# Altium PCB 1_ir-tara-f.PcbDoc (part 2 of 8)
Units mm, origin at the board's own origin, x right, y up, seen from the top; angles counter-clockwise.
Board outline 151 x 86.38 mm, 2 copper layers (Top Layer, Bottom Layer); 728 components, 20 nets, 2100 pads, 0 vias.
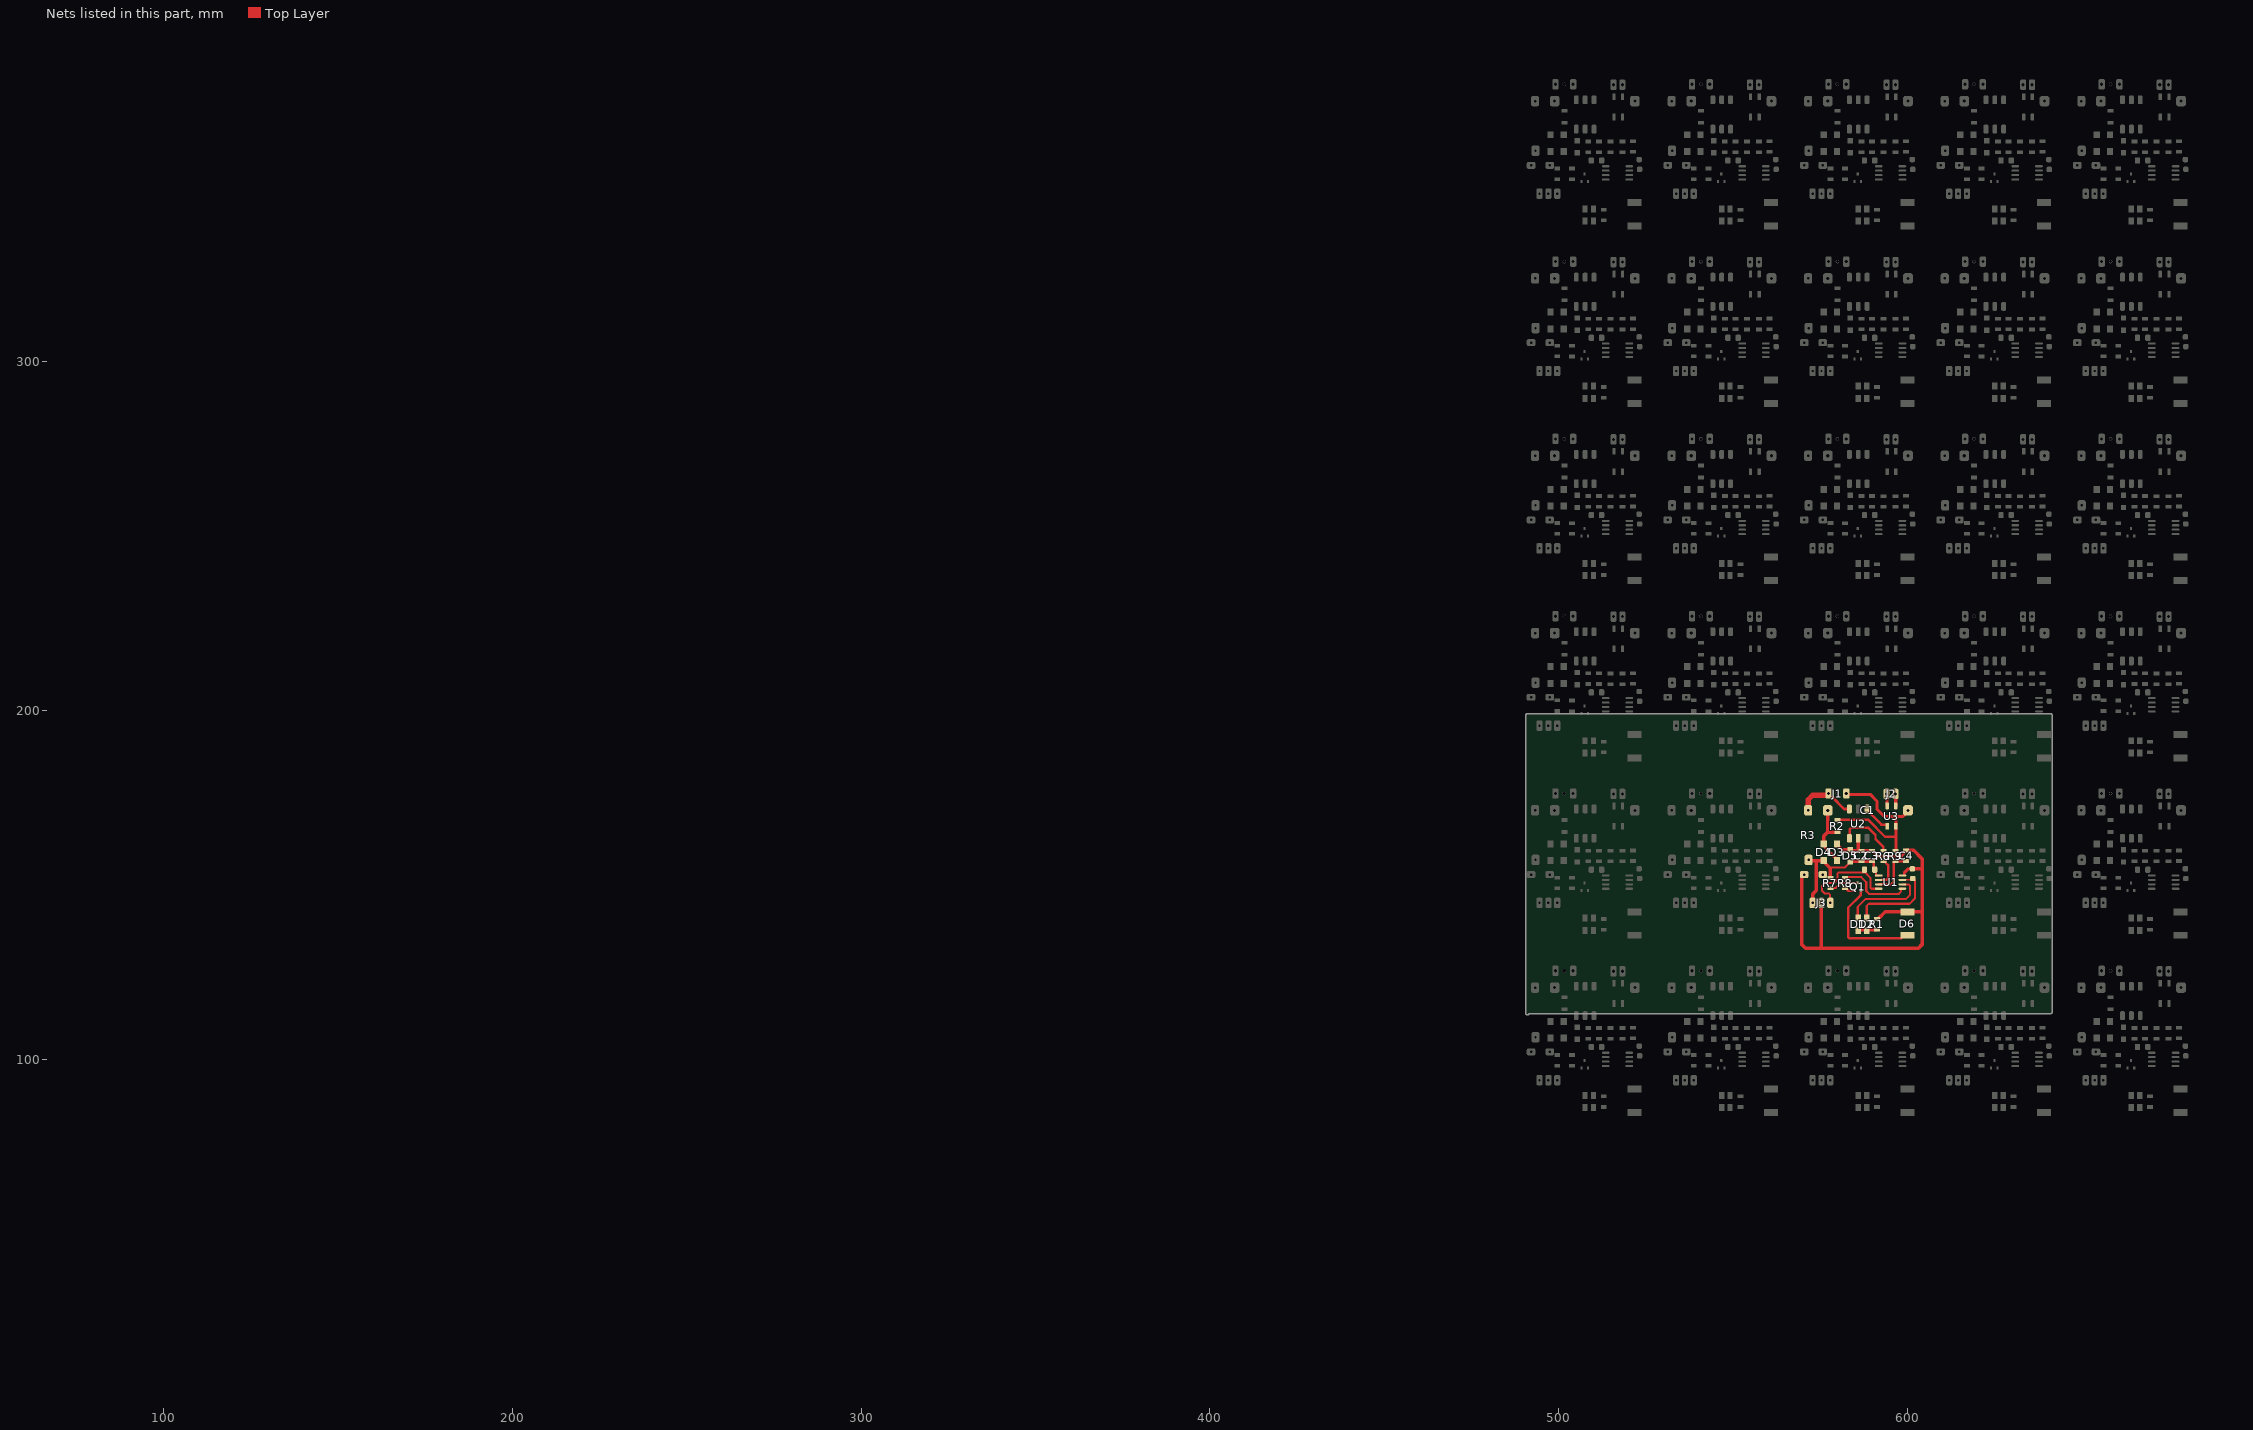
[diagram p2: the nets of this part, all layers, seen from the top]

## Part data
C1 C1 C1 C1 C1 C1 C1 C1 C1 C1 C1 C1 C1 C1 C1 C1 C1 C1 C1 C1 C1 C1 C1 C1 C1 C1 C1 C1 C1 C1: "Capacitor 24*9mm"
C2 C2 C2 C2 C2 C2 C2 C2 C2 C2 C2 C2 C2 C2 C2 C2 C2 C2 C2 C2 C2 C2 C2 C2 C2 C2 C2 C2 C2 C2 C3 C3 C3 C3 C3 C3 C3 C3 C3 C3 C3 C3 C3 C3 C3 C3 C3 C3 C3 C3 C3 C3 C3 C3 C3 C3 C3 C3 C3 C3 C4 C4 C4 C4 C4 C4 C4 C4 C4 C4 C4 C4 C4 C4 C4 C4 C4 C4 C4 C4 C4 C4 C4 C4 C4 C4 C4 C4 C4 C4: library part Capacitor, "Capacitor"
D1 D1 D1 D1 D1 D1 D1 D1 D1 D1 D1 D1 D1 D1 D1 D1 D1 D1 D1 D1 D1 D1 D1 D1 D1 D1 D1 D1 D1 D1 D2 D2 D2 D2 D2 D2 D2 D2 D2 D2 D2 D2 D2 D2 D2 D2 D2 D2 D2 D2 D2 D2 D2 D2 D2 D2 D2 D2 D2 D2 D6 D6 D6 D6 D6 D6 D6 D6 D6 D6 D6 D6 D6 D6 D6 D6 D6 D6 D6 D6 D6 D6 D6 D6 D6 D6 D6 D6 D6 D6: "Typical RED, GREEN, YELLOW, AMBER GaAs LED"
D3 D3 D3 D3 D3 D3 D3 D3 D3 D3 D3 D3 D3 D3 D3 D3 D3 D3 D3 D3 D3 D3 D3 D3 D3 D3 D3 D3 D3 D3 D4 D4 D4 D4 D4 D4 D4 D4 D4 D4 D4 D4 D4 D4 D4 D4 D4 D4 D4 D4 D4 D4 D4 D4 D4 D4 D4 D4 D4 D4 D5 D5 D5 D5 D5 D5 D5 D5 D5 D5 D5 D5 D5 D5 D5 D5 D5 D5 D5 D5 D5 D5 D5 D5 D5 D5 D5 D5 D5 D5: "Tunnel Diode - RLC Model"
Q1 Q1 Q1 Q1 Q1 Q1 Q1 Q1 Q1 Q1 Q1 Q1 Q1 Q1 Q1 Q1 Q1 Q1 Q1 Q1 Q1 Q1 Q1 Q1 Q1 Q1 Q1 Q1 Q1 Q1: "NPN Bipolar Transistor"
R1 R1 R1 R1 R1 R1 R1 R1 R1 R1 R1 R1 R1 R1 R1 R1 R1 R1 R1 R1 R1 R1 R1 R1 R1 R1 R1 R1 R1 R1 R2 R2 R2 R2 R2 R2 R2 R2 R2 R2 R2 R2 R2 R2 R2 R2 R2 R2 R2 R2 R2 R2 R2 R2 R2 R2 R2 R2 R2 R2 R3 R3 R3 R3 R3 R3 R3 R3 R3 R3 R3 R3 R3 R3 R3 R3 R3 R3 R3 R3 R3 R3 R3 R3 R3 R3 R3 R3 R3 R3 R6 R6 R6 R6 R6 R6 R6 R6 R6 R6 R6 R6 R6 R6 R6 R6 R6 R6 R6 R6 R6 R6 R6 R6 R6 R6 R6 R6 R6 R6 R7 R7 R7 R7 R7 R7 R7 R7 R7 R7 R7 R7 R7 R7 R7 R7 R7 R7 R7 R7 R7 R7 R7 R7 R7 R7 R7 R7 R7 R7 R8 R8 R8 R8 R8 R8 R8 R8 R8 R8 R8 R8 R8 R8 R8 R8 R8 R8 R8 R8 R8 R8 R8 R8 R8 R8 R8 R8 R8 R8 R9 R9 R9 R9 R9 R9 R9 R9 R9 R9 R9 R9 R9 R9 R9 R9 R9 R9 R9 R9 R9 R9 R9 R9 R9 R9 R9 R9 R9 R9: library part Resistor, "Resistor"
U1 U1 U1 U1 U1 U1 U1 U1 U1 U1 U1 U1 U1 U1 U1 U1 U1 U1 U1 U1 U1 U1 U1 U1 U1 U1 U1 U1 U1 U1: "8-Bit AVR Microcontroller with 1K Byte of Flash Memory"
U2 U2 U2 U2 U2 U2 U2 U2 U2 U2 U2 U2 U2 U2 U2 U2 U2 U2 U2 U2 U2 U2 U2 U2 U2 U2 U2 U2 U2 U2: "Optoisolator Triac Output 5300Vrms 1 Channel 6-DIP"
U3 U3 U3 U3 U3 U3 U3 U3 U3 U3 U3 U3 U3 U3 U3 U3 U3 U3 U3 U3 U3 U3 U3 U3 U3 U3 U3 U3 U3 U3: "Bridge Rectifier Single Phase Standard 600V Surface Mount 4-SOIC"

## Free pads (board coordinates)
  round 0 hole 0.95: 2(486.659,373.516) 2(499.976,77.452) 2(673.588,386.741) 2(686.927,90.586) 3(486.684,368.441) 3(505.051,77.477) 3(668.513,386.716) 3(686.902,95.661) 94(488.516,333.741) 94(488.516,282.902) 94(488.516,232.063) 94(488.516,181.225) 94(488.516,130.386) 94(528.055,79.166) 94(528.055,384.959) 94(567.209,79.166) 94(567.209,384.959) 94(606.364,79.166) 94(606.364,384.959) 94(645.519,79.166) 94(645.519,384.959) 94(685.053,333.741) 94(685.053,282.902) 94(685.053,232.063) 94(685.053,181.225) 94(685.053,130.386) 95(685.053,79.166) 96(685.053,384.959) 97(488.516,384.959) 98(488.516,79.166)
  rrect50% 2.5x2 hole 0.7: 4(497.428,356.366) 4(497.428,305.527) 4(497.428,254.689) 4(497.428,203.85) 4(497.428,153.011) 4(497.428,102.173) 4(536.582,356.366) 4(536.582,305.527) 4(536.582,254.689) 4(536.582,203.85) 4(536.582,153.011) 4(536.582,102.173) 4(575.737,356.366) 4(575.737,305.527) 4(575.737,254.689) 4(575.737,203.85) 4(575.737,153.011) 4(575.737,102.173) 4(614.892,356.366) 4(614.892,305.527) 4(614.892,254.689) 4(614.892,203.85) 4(614.892,153.011) 4(614.892,102.173) 4(654.046,356.366) 4(654.046,305.527) 4(654.046,254.689) 4(654.046,203.85) 4(654.046,153.011) 4(654.046,102.173) 5(492.094,356.366) 5(492.094,305.527) 5(492.094,254.689) 5(492.094,203.85) 5(492.094,153.011) 5(492.094,102.173) 5(531.248,356.366) 5(531.248,305.527) 5(531.248,254.689) 5(531.248,203.85) 5(531.248,153.011) 5(531.248,102.173) 5(570.403,356.366) 5(570.403,305.527) 5(570.403,254.689) 5(570.403,203.85) 5(570.403,153.011) 5(570.403,102.173) 5(609.558,356.366) 5(609.558,305.527) 5(609.558,254.689) 5(609.558,203.85) 5(609.558,153.011) 5(609.558,102.173) 5(648.712,356.366) 5(648.712,305.527) 5(648.712,254.689) 5(648.712,203.85) 5(648.712,153.011) 5(648.712,102.173)
  rrect50% 1.524x1.524 all layers, no hole: 6(523.082,358.017) 6(523.082,307.178) 6(523.082,256.34) 6(523.082,205.501) 6(523.082,154.662) 6(523.082,103.824) 6(562.236,358.017) 6(562.236,307.178) 6(562.236,256.34) 6(562.236,205.501) 6(562.236,154.662) 6(562.236,103.824) 6(601.391,358.017) 6(601.391,307.178) 6(601.391,256.34) 6(601.391,205.501) 6(601.391,154.662) 6(601.391,103.824) 6(640.546,358.017) 6(640.546,307.178) 6(640.546,256.34) 6(640.546,205.501) 6(640.546,154.662) 6(640.546,103.824) 6(679.7,358.017) 6(679.7,307.178) 6(679.7,256.34) 6(679.7,205.501) 6(679.7,154.662) 6(679.7,103.824) 7(523.209,355.223) 7(523.209,304.384) 7(523.209,253.546) 7(523.209,202.707) 7(523.209,151.868) 7(523.209,101.03) 7(562.363,355.223) 7(562.363,304.384) 7(562.363,253.546) 7(562.363,202.707) 7(562.363,151.868) 7(562.363,101.03) 7(601.518,355.223) 7(601.518,304.384) 7(601.518,253.546) 7(601.518,202.707) 7(601.518,151.868) 7(601.518,101.03) 7(640.673,355.223) 7(640.673,304.384) 7(640.673,253.546) 7(640.673,202.707) 7(640.673,151.868) 7(640.673,101.03) 7(679.827,355.223) 7(679.827,304.384) 7(679.827,253.546) 7(679.827,202.707) 7(679.827,151.868) 7(679.827,101.03)
  rrect50% 1.524x1.8 all layers, no hole: 8(512.316,357.763) 8(512.316,306.924) 8(512.316,256.086) 8(512.316,205.247) 8(512.316,154.408) 8(512.316,103.57) 8(551.47,357.763) 8(551.47,306.924) 8(551.47,256.086) 8(551.47,205.247) 8(551.47,154.408) 8(551.47,103.57) 8(590.625,357.763) 8(590.625,306.924) 8(590.625,256.086) 8(590.625,205.247) 8(590.625,154.408) 8(590.625,103.57) 8(629.78,357.763) 8(629.78,306.924) 8(629.78,256.086) 8(629.78,205.247) 8(629.78,154.408) 8(629.78,103.57) 8(668.934,357.763) 8(668.934,306.924) 8(668.934,256.086) 8(668.934,205.247) 8(668.934,154.408) 8(668.934,103.57) 9(509.366,357.763) 9(509.366,306.924) 9(509.366,256.086) 9(509.366,205.247) 9(509.366,154.408) 9(509.366,103.57) 9(548.52,357.763) 9(548.52,306.924) 9(548.52,256.086) 9(548.52,205.247) 9(548.52,154.408) 9(548.52,103.57) 9(587.675,357.763) 9(587.675,306.924) 9(587.675,256.086) 9(587.675,205.247) 9(587.675,154.408) 9(587.675,103.57) 9(626.83,357.763) 9(626.83,306.924) 9(626.83,256.086) 9(626.83,205.247) 9(626.83,154.408) 9(626.83,103.57) 9(665.984,357.763) 9(665.984,306.924) 9(665.984,256.086) 9(665.984,205.247) 9(665.984,154.408) 9(665.984,103.57)

## Nets (pads, with @x,y where several pads share a name; then routed paths per layer and width w, separated by ;. In a path a pad name is that pad's centre, name@x,y a point inside that pad or via, vN(x,y) a via of type N, cw(c..) or ccw(c..) an arc to the next point about the centre after c; other vN are vias at no path point)
GND: C2.2@586.786,159.862 C3.2@589.834,159.862 C4.1@599.613,159.933 D3.1@579.801,161.784 D5.1@583.611,160.095 D6.2@599.994,142.343 J3.2@575.356,144.883 pad.5@570.403,153.011 pad.6@601.391,154.662 R1.2@591.231,140.273 U1.8@598.568,152.757 U2.2@585.897,163.407 | length 142.9
  Top Layer w0.5: C3.2@589.834,159.862 590.159,159.862 590.434,159.587 C3.2@590.434,159.523 ; U1.8@599.052,152.757 U1.8@599.098,152.804
  Top Layer w0.7: C3.2@590.434,159.523 591.64,158.318 598.315,158.318 599.054,159.056 C4.1@599.054,159.658
  Top Layer w0.8: U1.8@599.105,153.011 599.105,153.519 600.248,154.662 pad.6@601.391,154.662
  Top Layer w1: pad.5@570.403,153.011 570.153,153.011 569.653,152.511 569.653,151.938 569.641,151.926 569.641,133.072 570.784,131.929 575.102,131.929 ; J3.2@575.356,144.883 575.356,132.183 575.102,131.929 ; D3.1@580.291,161.157 581.353,160.095 582.98,160.095 D5.1@583.103,160.095 ; D5.1@583.23,160.095 D5.1@583.103,160.095 ; U2.2@585.897,163.407 585.897,159.862 ; C3.2@589.064,159.862 C2.2@586.786,159.862 585.897,159.862 ; R1.2@591.231,140.273 591.556,140.273 593.626,142.343 D6.2@599.994,142.343 604.185,142.343 ; C4.1@599.613,159.933 601.835,159.933 604.185,157.583 604.185,154.789 ; pad.6@601.391,154.662 604.058,154.662 604.185,154.789 ; 575.102,131.929 603.169,131.929 604.185,132.945 604.185,142.343 ; D5.1@583.103,160.095 583.336,159.862 585.897,159.862 ; 604.185,142.343 604.185,154.789
ir-r: J3.3@577.896,144.883 pad.9@587.675,154.408 U1.4@591.768,148.947 | length 29.4
  Top Layer w0.6: J3.3@577.896,145.137 577.833,145.201 577.833,147.199 577.481,147.55 576.372,147.55 575.483,148.439 575.483,149.709 576.372,150.598 579.027,150.598 579.928,151.5 579.928,153.273 580.28,153.625 582.337,153.625 582.359,153.646 pad.9@587.675,153.646 ; pad.9@587.675,154.408 587.675,153.773 589.453,151.995 589.453,149.24 589.746,148.947 U1.4@591.768,148.947
ir-t: R8.1@582.142,152.095 U1.5@598.568,148.947 | length 21.1
  Top Layer w0.6: R8.1@582.087,152.258 586.777,152.258 588.183,150.852 588.183,148.312 589.072,147.423 597.454,147.423 598.13,148.099 598.13,148.947 U1.5@598.568,148.947
l1: D2.1@588.31,140.537 pad.7@601.518,151.868 U1.7@598.568,151.487 | length 27.3
  Top Layer w0.5: U1.7@598.568,151.487 pad.7@601.384,151.487
  Top Layer w0.6: D2.1@588.31,140.537 588.346,140.573 588.346,144.03 588.945,144.629 600.629,144.629 602.153,146.153 602.153,151.445 601.547,152.051 pad.7@601.518,151.868
l2: D1.1@585.897,140.537 U1.6@598.568,150.217 | length 24.4
  Top Layer w0.6: D1.1@585.77,140.537 585.77,143.74 588.056,146.026 599.613,146.026 600.711,147.124 600.711,149.924 600.418,150.217 U1.6@598.77,150.217
NetC1_2: C1.2@577.155,171.426 D3.2@579.801,156.984 D4.1@575.991,161.784 R2.2@579.928,165.203 | length 19
  Top Layer w0.8: D4.1@576.391,161.284 576.491,161.184 576.491,160.649 579.301,157.839 579.301,157.484 D3.2@579.801,156.984 ; D3.2@580.042,157.225 580.309,156.957 D3.2@580.309,156.857
  Top Layer w1: D4.1@575.991,161.784 575.991,164.06 577.134,165.203 R2.2@579.928,165.203 ; 577.134,165.33 577.134,171.405 C1.2@577.155,171.426
NetD1_2: D1.2@585.897,137.037 D2.2@588.31,137.037 R1.1@591.231,137.224 | length 8.1
  Top Layer w0.5: D1.2@585.77,137.037 D1.2@585.897,137.037 D2.2@588.31,137.037
  Top Layer w0.6: D2.2@588.217,137.131 D2.2@588.31,137.037 D2.2@588.403,137.131 ; R1.1@591.138,137.131 R1.1@591.231,137.224
  Top Layer w1: D1.2@585.77,137.131 D2.2@588.217,137.131 ; D2.2@588.403,137.131 R1.1@591.138,137.131
NetD6_1: D6.1@599.994,135.612 Q1.2@586.72,148.38 | length 32.4
  Top Layer w0.7: Q1.2@586.72,148.446 586.72,148.08 586.659,148.019 586.659,147.169 582.976,143.486 582.976,135.075 583.328,134.723 598.105,134.723 599.502,136.12 D6.1@599.74,136.12
NetJ2_1: J2.1@594.025,176.125 U3.2@594.197,172.675 | length 3.5
  Top Layer w0.9: J2.1@594.025,176.125 594.152,175.998 594.152,173.22 594.197,173.175 U3.2@594.197,172.675
NetJ2_2: J2.2@596.565,176.125 U3.1@596.647,172.675 | length 3.5
  Top Layer w0.9: J2.2@596.438,176.125 596.642,175.921 596.642,172.68 U3.1@596.647,172.675
NetQ1_1: Q1.3@585.77,150.53 R7.1@577.896,149.065 | length 8.5
  Top Layer w0.6: R7.1@577.896,149.065 578.037,149.206 579.538,149.206 580.867,150.535 Q1.3@585.77,150.535
NetQ1_2: Q1.1@584.82,148.38 R8.2@582.142,149.045 | length 3.1
  Top Layer w0.7: R8.2@582.142,149.045 582.467,149.045 582.742,148.77 582.742,148.673 583.035,148.38 Q1.1@584.87,148.38
NetR4_2: 
NetR6_1: R6.1@593.136,159.831 U2.1@583.357,163.407 | length 16
  Top Layer w0.7: U2.1@583.484,163.821 583.484,166.063 583.894,166.473 588.691,166.473 590.85,164.314 590.85,163.171 593.009,161.012 R6.1@593.009,159.831
NetU2_4: U2.4@588.437,171.807 U3.3@594.197,166.875 | length 8.3
  Top Layer w0.7: U2.4@588.437,171.807 588.437,171.257 588.787,170.907 588.956,170.907 592.522,167.342 594.092,167.342 594.197,167.237 U3.3@594.197,166.875
nol: C1.1@600.155,171.426 J1.3@582.468,176.252 R2.1@579.928,168.641 R9.1@596.565,159.831 U3.4@596.647,166.875 | length 51.1
  Top Layer w0.7: R2.1@579.928,168.759 588.691,168.759 593.644,163.806 596.692,163.806
  Top Layer w0.9: J1.3@582.595,175.998 589.326,175.998 591.231,174.093 591.231,171.807 593.39,169.648 596.692,169.648 ; R9.1@596.565,159.831 596.617,159.831 596.692,159.906 596.692,163.806 596.692,166.118 596.652,166.158 596.652,166.87 U3.4@596.647,166.875 596.652,166.88 596.652,167.593 596.692,167.633 596.692,169.648 ; C1.1@600.581,170.617 599.581,170.617 599.205,170.241 599.205,170.176 598.678,169.648 596.692,169.648
out: R6.2@593.136,156.782 U1.2@591.768,151.487 | length 7.3
  Top Layer w0.65: U1.2@592.543,151.487 594.025,151.487
  Top Layer w0.7: R6.2@593.548,156.694 593.736,156.507 593.736,156.38 594.533,155.583 594.533,151.995 594.025,151.487
vcc: C2.1@586.786,156.812 C3.1@589.834,156.812 D4.2@575.991,156.984 D5.2@583.611,156.595 J3.1@572.816,144.883 pad.4@575.737,153.011 pad.8@590.625,154.408 R3.2@571.673,157.202 R7.2@577.896,152.115 U1.1@591.768,152.757 | length 38.6
  Top Layer w0.6: 577.642,155.043 582.059,155.043 583.421,156.405 D5.2@583.611,156.595 ; C3.1@589.834,156.812 590.117,156.812 C3.1@590.342,156.587 ; pad.8@590.342,154.975 pad.8@590.625,154.692 ; pad.8@590.625,154.408 591.037,153.996 591.037,152.757 U1.1@591.768,152.757
  Top Layer w0.8: pad.8@590.342,154.975 C3.1@590.342,156.587
  Top Layer w1: R3.2@572.412,156.984 573.832,156.984 ; J3.1@572.816,145.137 572.816,147.423 573.832,148.439 573.832,156.984 ; 577.861,154.444 577.861,152.14 577.886,152.115 R7.2@577.896,152.115 ; 577.861,154.825 576.391,156.294 576.391,156.484 575.891,156.984 573.832,156.984 ; D5.2@583.828,156.812 C2.1@586.151,156.812 ; C2.1@586.278,156.812 586.287,156.821 C3.1@589.707,156.821
vdd: J1.1@577.388,176.252 R3.1@571.546,171.426 U2.6@583.357,171.807 | length 17.4
  Top Layer w0.8: J1.1@577.261,175.752 577.661,175.352 578.288,175.352 581.833,171.807 U2.6@583.357,171.807
  Top Layer w1: J1.1@576.988,175.759 577.388,176.159 J1.1@577.388,176.252
  Top Layer w1.5: R3.1@571.546,171.426 571.546,174.474 572.83,175.759 J1.1@576.988,175.759
zero: C4.2@599.613,156.883 R9.2@596.565,156.782 U1.3@591.768,150.217 | length 13.5
  Top Layer w0.65: U1.3@591.768,150.217 591.773,150.212 595.29,150.212 596.065,150.987
  Top Layer w0.7: 596.065,150.987 596.065,156.607 596.24,156.782 R9.2@596.565,156.782 ; R9.2@596.946,156.694 597.076,156.824 C4.2@599.613,156.824